# EAGLE board Cap-M-Supreme (EAGLE 3.55)

No outline drawn. Coordinates in mm, seen from the top.
Copper layers used: 

## Footprints (pad centres in the part's own frame; a part is rotated, then mirrored left to right if it is on the bottom)
*34 = drill 1.27 pad 2.54 octagon:  -19.05,0;  19.05,0
*37 = drill 1.27 pad 2.54 octagon:  -20.32,0;  20.32,0
*55 = drill 1.676 pad 3.81 octagon:  -29.21,0;  29.21,0
*68 = drill 1.676 pad 3.81 octagon:  -35.56,0;  35.56,0
*103 = drill 1.676 pad 3.81 octagon:  -53.34,0;  53.34,0
*60 = drill 1.676 pad 3.81 octagon:  -31.75,0;  31.75,0
*104 = drill 1.676 pad 3.81 octagon:  -54.61,0;  54.61,0

## Placement (x,y rotation side)
16*34  [*34]  41.91,240.03 0 top
18*37  [*37]  96.52,240.03 0 top
20*37  [*37]  151.13,240.03 0 top
25*55  [*55]  52.07,207.01 0 top
35*68  [*68]  135.89,207.01 0 top
35*103  [*103]  76.2,127 0 top
40*60  [*60]  54.61,167.64 0 top
40*103  [*103]  76.2,85.09 0 top
50*104  [*104]  76.2,35.56 0 top
TQFP1  [-35SC]  0,0 0 top

## Library data of the parts
16*34 18*37 20*37 25*55 35*68 35*103 40*60 40*103 50*104 = cap-m-su
TQFP1 = BLATT